# Altium PCB PCBESP.PcbDoc
Units mil, origin at the board's own origin, x right, y up, seen from the top; angles counter-clockwise.
Board outline 4330.71 x 2913.39 mil, 2 copper layers (Top Layer, Bottom Layer); 31 components, 54 nets, 178 pads, 26 vias.
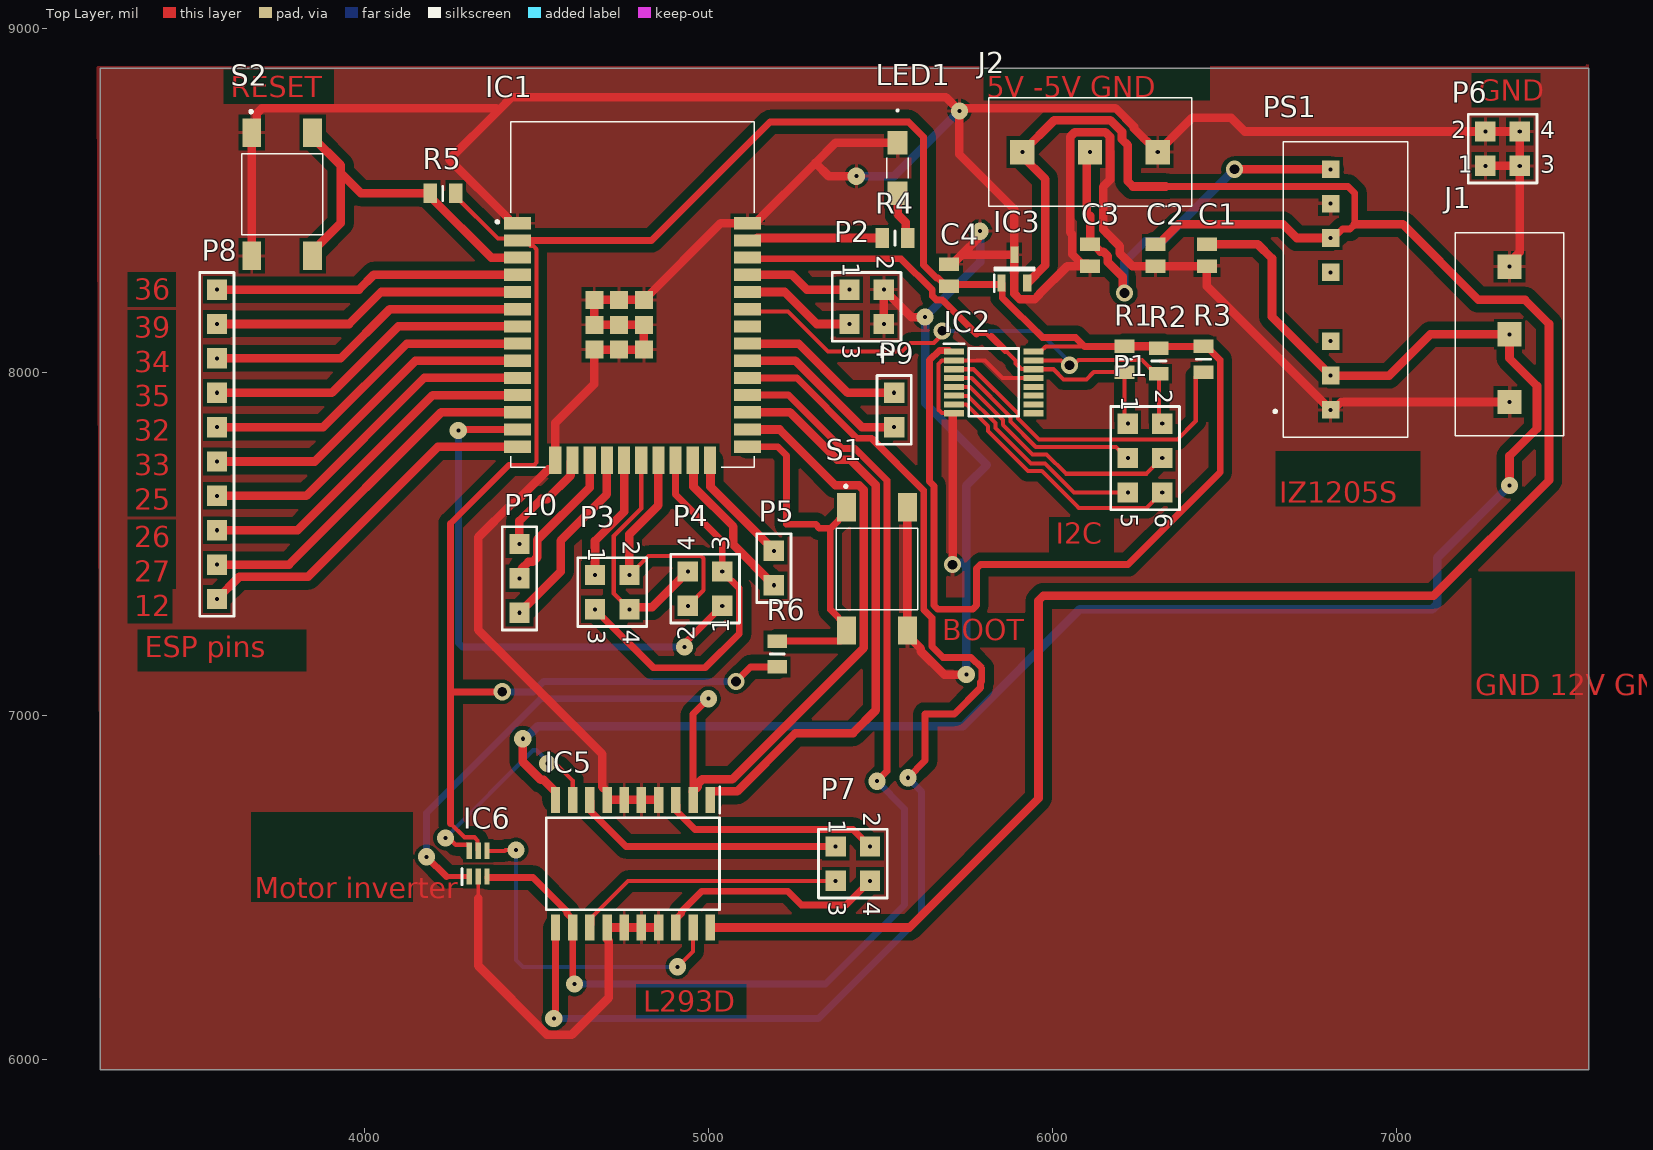
[diagram p0: Top Layer view]
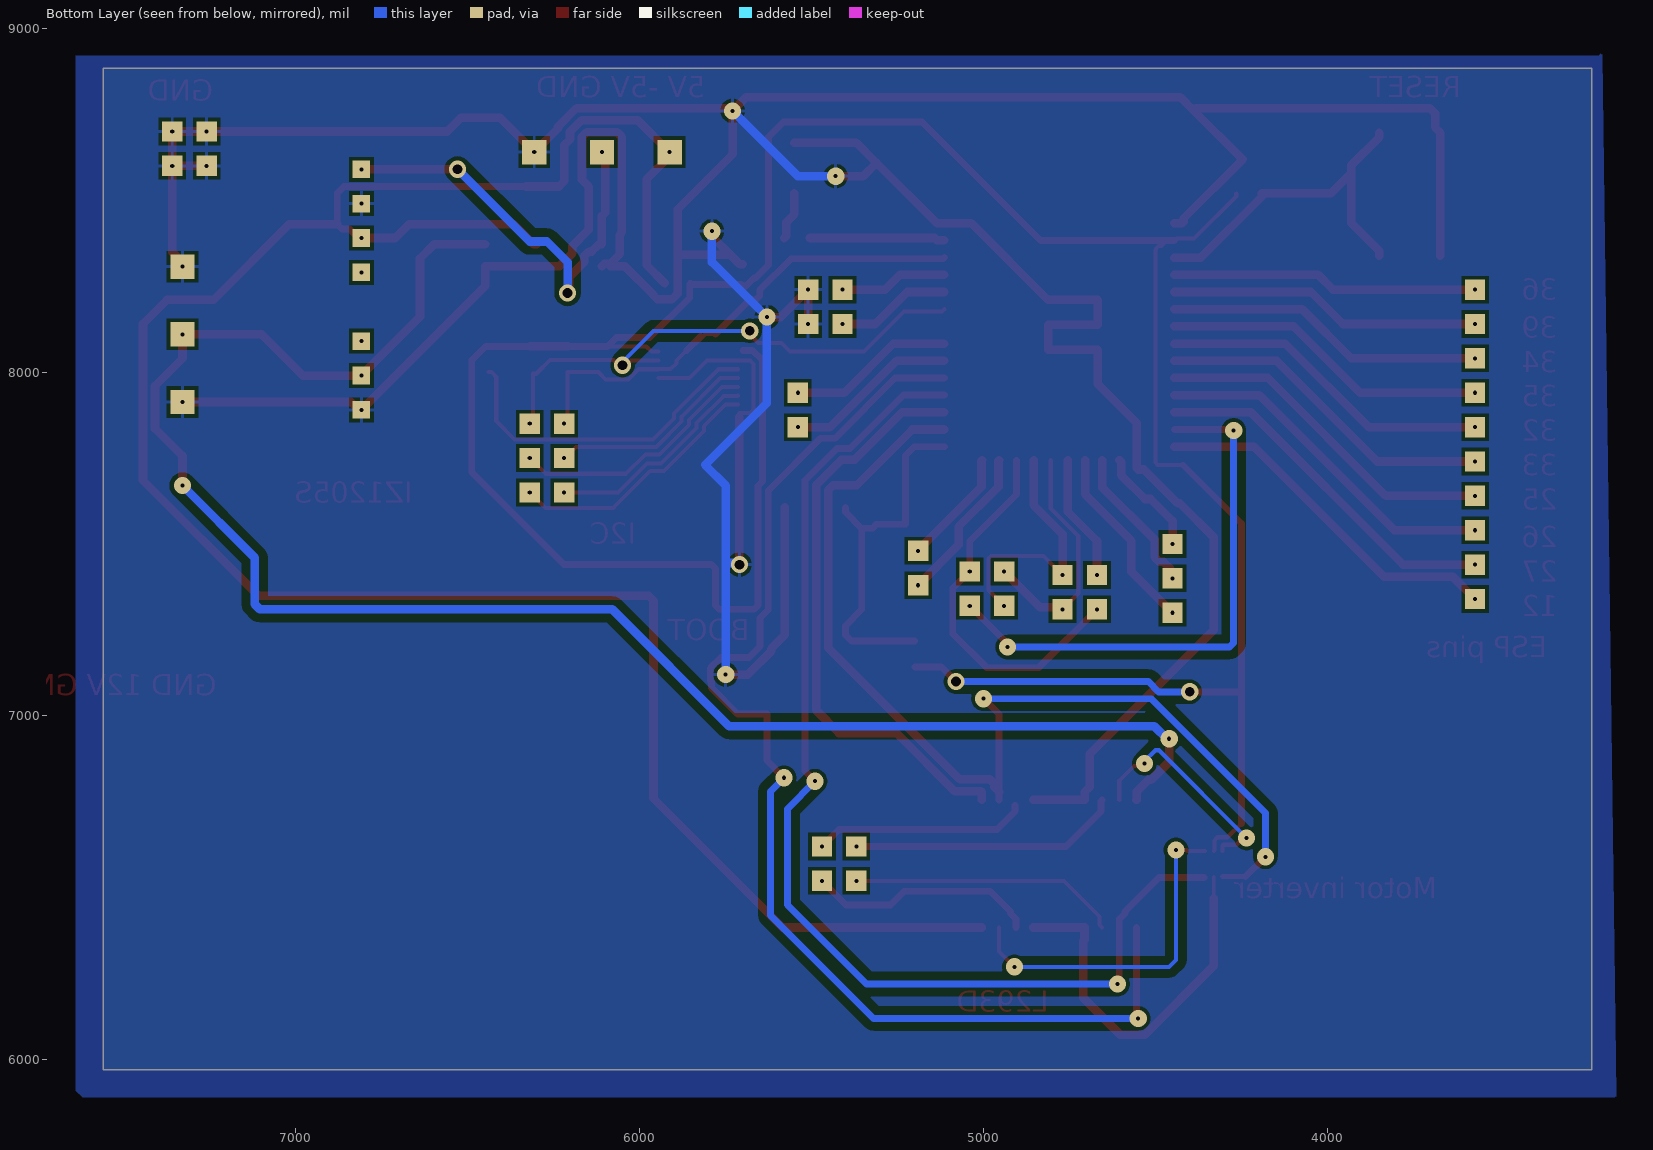
[diagram p1: Bottom Layer view, seen from below]
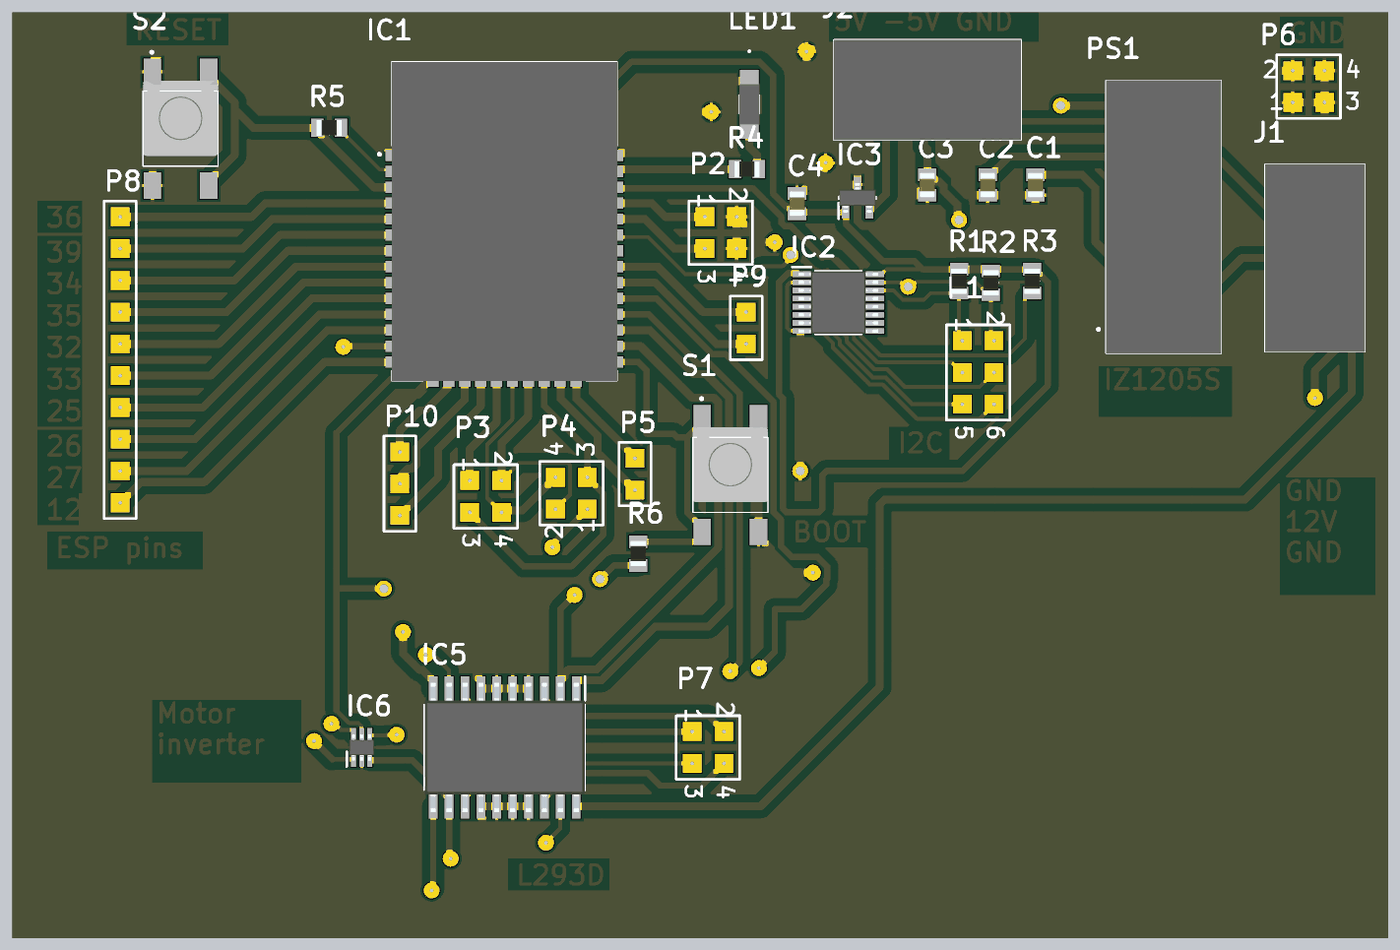
[diagram p2: 3D render of the assembled board from above, using the file's embedded part models]

## Layer stack, top to bottom
Top Solder: solder mask 0.4, Solder Resist, Dk 3.5
Top Layer: signal copper 1.4
Dielectric 1: dielectric 12.6, FR-4, Dk 4.8
Bottom Layer: signal copper 1.4
Bottom Solder: solder mask 0.4, Solder Resist, Dk 3.5

## Board outline
3230,5970 3230,8883.39 7560.71,8883.39 7560.71,5970

## Design rules (kind name [scope] priority, off if disabled: settings)
Clearance [All] p1: gap=10 ignorepadtopadclearanceinfootprint=FALSE except(6: SMDPad-SMDPad; 25: Arc-Fill Arc-Poly Arc-Region Track-Fill Track-Poly Track-Region)
PolygonConnect [All] p1: connectstyle=Relief reliefconductorwidth=10 reliefentries=4 polygonreliefangle="90 Angle" airgapwidth=10
RoutingVias [All] p1: holewidth=27.99 width=50 viastyle="Through Hole" minholewidth=11.81 minwidth=50 maxholewidth=27.99 maxwidth=50
SolderMaskExpansion [All] p1: expansion=4 istentingtop=FALSE
Width [All] p1: maxlimit=100 minlimit=10 preferedwidth=25 minimp=50.000000 maximp=50.000000 favimp=50.000000
30 further rules are at their usual default settings.

## Components (designator, comment, footprint, x,y, rotation, side; value= is the part's Value field where it differs from the comment)
C1 "100nF" CAPC2012X94N 6450,8340 r270 top
C2 "100nF" CAPC2012X94N 6300,8340 r90 top
C3 "100nF" CAPC2012X94N 6110,8340 r90 top
C4 "100nF" CAPC2012X94N 5700,8281.89 r270 top
IC1 "ESP32_WROOM32" ESP32WROOM32 4740,8137.76 r0 top
IC2 "PCA9846PWJ" SOP65P640X110-16N 5830,7970 r0 top
IC3 "LM3480IM3-3.3" SOT95P237X112-3N 5890,8300 r90 top
IC5 "L293DD" SOIC127P1032X265-20N 4780,6570 r270 top
IC6 "NC7WZ04P6X" SOT65P210X110-6N 4330,6570 r90 top
J1 "20.500M_3" 20500M3 7330,7913.15 r90 top
J2 "20.500M_3" 20500M3 6306.85,8640 r180 top
LED1 "APTD3216SECK" APTD3216SECK 5550,8593.82 r270 top
P1 "Header 3X2" HDR2X3 6220,7850 r270 top
P2 "Header 2X2" HDR2X2 5410,8240 r270 top
P3 "Header 2X2" HDR2X2 4670,7410 r270 top
P4 "Header 2X2" HDR2X2 5040,7320 r90 top
P5 "Header 2" HDR1X2 5190,7380 r90 top
P6 "Header 2X2" HDR2X2 7260,8600 r0 top
P7 "Header 2X2" HDR2X2 5370,6620 r270 top
P8 "Header 10" HDR1X10 3570,8240 r270 top
P9 "Header 2" HDR1X2 5540,7840 r90 top
P10 "Header 3" HDR1X3 4450,7500 r270 top
PS1 "IZ1205S" IZ1205S 6810,7890 r90 top
R1 "4.7k" RESC2012X65N 6210,8037.4 r90 top
R2 "4.7k" RESC2012X65N 6310,8032.6 r90 top
R3 "20k" RESC2012X65N 6440,8037.4 r90 top
R4 "200R" RESC2012X65N 5542.6,8390 r0 top
R5 "10k" RESC2012X65N 4227.4,8520 r180 top
R6 "10k" RESC2012X65N 5200,7180 r90 top
S1 "4-1437565-9" 414375659 5490,7460 r0 top
S2 "4-1437565-9" 414375659 3760,8550 r0 top

## Footprints (in the part's own frame and the unit in brackets; to place one, negate y for a bottom-side part, rotate by r counter-clockwise, add the part's x,y. Pads: shape width x height; smd on the part's side, far side on the other; paste and mask are expansions set on the pad)
20500M3 [mm]
  rect 1.8x1.8 hole 0.3: 1(0,0) 2(5,0) 3(10,0)
  silkscreen extent -2.5,-4 12.5,4, body extent -2.5,-4 12.5,4, height 10.3
414375659 [mm]
  rect 1.4x2.1 smd: 1(-2.25,3.725) 2(-2.25,-5.375) 3(2.25,3.725) 4(2.25,-5.375)
  silkscreen extent -3,-3.83 3,5.37, body extent -3,-5 3,5, height 3.4
APTD3216SECK [mm]
  rect 1.75x1.5 smd: 1(-1.875,0) 2(1.875,0)
  silkscreen extent -4.3,-0.8 0.75,0.8, body extent -1.6,-0.8 1.6,0.8, height 1.9
CAPC2012X94N [mm]
  rect 1.02x1.47 smd: 1(-0.81,0) 2(0.81,0)
  body extent -1,-0.63 1,0.63, height 0.94
ESP32WROOM32 [mm]
  rect 2x0.9 smd: 1(-7.5,7.5) 2(-7.5,6.23) 3(-7.5,4.96) 4(-7.5,3.69) 5(-7.5,2.42) 6(-7.5,1.15) 7(-7.5,-0.12) 8(-7.5,-1.39) 9(-7.5,-2.66) 10(-7.5,-3.93) 11(-7.5,-5.2) 12(-7.5,-6.47) 13(-7.5,-7.74) 14(-7.5,-9.01) 25(9.5,-9.01) 26(9.5,-7.74) 27(9.5,-6.47) 28(9.5,-5.2) 29(9.5,-3.93) 30(9.5,-2.66) 31(9.5,-1.39) 32(9.5,-0.12) 33(9.5,1.15) 34(9.5,2.42) 35(9.5,3.69) 36(9.5,4.96) 37(9.5,6.23) 38(9.5,7.5)
  rect 0.9x2 smd: 15(-4.715,-10.01) 16(-3.445,-10.01) 17(-2.175,-10.01) 18(-0.905,-10.01) 19(0.365,-10.01) 20(1.635,-10.01) 21(2.905,-10.01) 22(4.175,-10.01) 23(5.445,-10.01) 24(6.715,-10.01)
  rect 1.33x1.33 smd: 39(-1.835,1.835) 40(0,1.835) 41(1.835,1.835) 42(-1.835,0) 43(0,0) 44(1.835,0) 45(-1.835,-1.835) 46(0,-1.835) 47(1.835,-1.835)
  silkscreen extent -9.1,-10.51 10,14.99, body extent -8,-10.51 10,14.99, height 3.3
HDR1X2 [mm] "Connector; Header; 2 Position"
  rect 1.5x1.5 hole 0.3: 1(0,0) 2(2.54,0)
  silkscreen extent -1.27,-1.27 3.81,1.27
HDR1X3 [mm] "Connector; Header; 3 Position"
  rect 1.5x1.5 hole 0.3: 1(0,0) 2(2.54,0) 3(5.08,0)
  silkscreen extent -1.27,-1.27 6.35,1.27
HDR1X10 [mm] "Connector; Header; 10 Position"
  rect 1.5x1.5 hole 0.3: 1(0,0) 2(2.54,0) 3(5.08,0) 4(7.62,0) 5(10.16,0) 6(12.7,0) 7(15.24,0) 8(17.78,0) 9(20.32,0) 10(22.86,0)
  silkscreen extent -1.27,-1.27 24.13,1.27
HDR2X2 [mm] "Connector; Header; 2x2 Position"
  rect 1.5x1.5 hole 0.3: 1(0,0) 2(0,2.54) 3(2.54,0) 4(2.54,2.54)
  silkscreen extent -1.27,-1.27 3.81,3.81
HDR2X3 [mm] "Connector; Header; 3x2 Position"
  rect 1.5x1.5 hole 0.3: 1(0,0) 2(0,2.54) 3(2.54,0) 4(2.54,2.54) 5(5.08,0) 6(5.08,2.54)
  silkscreen extent -1.27,-1.27 6.35,3.81
IZ1205S [mm]
  rect 1.303x1.303 hole 0.3: 1(0,0) 2(2.54,0) 3(5.08,0) 5(10.16,0) 6(12.7,0) 7(15.24,0) 8(17.78,0)
  silkscreen extent -2.03,-5.7 19.81,4.2, body extent -2.03,-5.7 19.82,3.5, height 11.2
RESC2012X65N [mm]
  rect 1x1.45 smd: 1(-0.95,0) 2(0.95,0)
  silkscreen extent 0,-0.53 0,0.53, body extent -1,-0.63 1,0.63, height 0.65
SOIC127P1032X265-20N [mm]
  rect 1.925x0.7 smd: 1(-4.712,5.715) 2(-4.712,4.445) 3(-4.712,3.175) 4(-4.712,1.905) 5(-4.712,0.635) 6(-4.712,-0.635) 7(-4.712,-1.905) 8(-4.712,-3.175) 9(-4.712,-4.445) 10(-4.712,-5.715) 11(4.712,-5.715) 12(4.712,-4.445) 13(4.712,-3.175) 14(4.712,-1.905) 15(4.712,-0.635) 16(4.712,0.635) 17(4.712,1.905) 18(4.712,3.175) 19(4.712,4.445) 20(4.712,5.715)
  silkscreen extent -5.68,-6.4 3.4,6.42, body extent -5.16,-6.4 5.16,6.4, height 2.65
SOP65P640X110-16N [mm]
  rect 1.475x0.45 smd: 1(-2.938,2.275) 2(-2.938,1.625) 3(-2.938,0.975) 4(-2.938,0.325) 5(-2.938,-0.325) 6(-2.938,-0.975) 7(-2.938,-1.625) 8(-2.938,-2.275) 9(2.938,-2.275) 10(2.938,-1.625) 11(2.938,-0.975) 12(2.938,-0.325) 13(2.938,0.325) 14(2.938,0.975) 15(2.938,1.625) 16(2.938,2.275)
  silkscreen extent -3.67,-2.5 1.85,2.85, body extent -3.2,-2.5 3.2,2.5, height 1.1
SOT65P210X110-6N [mm]
  rect 1.2x0.4 smd: 1(-0.95,0.65) 2(-0.95,0) 3(-0.95,-0.65) 4(0.95,-0.65) 5(0.95,0) 6(0.95,0.65)
  silkscreen extent -1.55,1.2 -0.35,1.2, body extent -1.05,-1 1.05,1, height 1.1
SOT95P237X112-3N [mm]
  rect 1.25x0.6 smd: 1(-1.05,0.95) 2(-1.05,-0.95) 3(1.05,0)
  silkscreen extent -1.68,-1.46 0.08,1.5, body extent -1.18,-1.46 1.18,1.46, height 1.12

## Part data
C1 C2 C3 C4: library part 08055A130JAT2A, "Capacitor", Manufacturer_Name=AVX, Mouser Part Number=581-08055A130JAT2A, Datasheet Link=https://componentsearchengine.com/Datasheets/1/06031A100FAT2A.pdf, Height=0.94mm, Manufacturer_Part_Number=08055A130JAT2A, Mouser Price/Stock=https://www.mouser.com/Search/Refine.aspx?Keyword=581-08055A130JAT2A
IC1: "Integrated Circuit", Manufacturer_Name="Espressif Systems", Manufacturer_Part_Number="ESP32 WROOM32", Datasheet Link=https://www.espressif.com/sites/default/files/documentation/esp32-wroom-32_datasheet_en.pdf, Height=3.2mm
IC2: "Integrated Circuit", Manufacturer_Name=NXP, Mouser Part Number=771-PCA9846PWJ, Datasheet Link=http://www.nxp.com/docs/en/data-sheet/PCA9846.pdf, Height=1.1mm, Manufacturer_Part_Number=PCA9846PWJ, Mouser Price/Stock=https://www.mouser.com/Search/Refine.aspx?Keyword=771-PCA9846PWJ
IC3: "Integrated Circuit", Manufacturer_Name="Texas Instruments", Mouser Part Number=926-LM3480IM3-33, Arrow Part Number=LM3480IM3-3.3, Arrow Price/Stock=https://www.arrow.com/en/products/lm3480im3-3.3/texas-instruments, Datasheet Link=http://www.ti.com/lit/ds/symlink/lm3480.pdf, Height=1.12mm, Manufacturer_Part_Number=LM3480IM3-3.3, Mouser Price/Stock=https://www.mouser.co.uk/ProductDetail/Texas-Instruments/LM3480IM3-33/?qs=X1J7HmVL2ZF9L3Vb4i2kPg%3D%3D
IC5: "Integrated Circuit", Manufacturer_Name=STMicroelectronics, Mouser Part Number=511-L293DD, Arrow Part Number=L293DD, Arrow Price/Stock=https://www.arrow.com/en/products/l293dd/stmicroelectronics, Datasheet Link=https://www.st.com/resource/en/datasheet/l293d.pdf, Height=2.65mm, Manufacturer_Part_Number=L293DD, Mouser Price/Stock=https://www.mouser.co.uk/ProductDetail/STMicroelectronics/L293DD?qs=m4gxtLzGBzoksItTiSkcgg%3D%3D
IC6: "Integrated Circuit", Manufacturer_Name="ON Semiconductor", Mouser Part Number=512-NC7WZ04P6X, Arrow Part Number=NC7WZ04P6X, Arrow Price/Stock=https://www.arrow.com/en/products/nc7wz04p6x/on-semiconductor, Datasheet Link=http://docs-emea.rs-online.com/webdocs/0f9b/0900766b80f9b620.pdf, Height=1.1mm, Manufacturer_Part_Number=NC7WZ04P6X, Mouser Price/Stock=https://www.mouser.co.uk/ProductDetail/ON-Semiconductor-Fairchild/NC7WZ04P6X?qs=CR8BwU6haLfI%2Fe3Upy6lhw%3D%3D
J1 J2: "Connector", Manufacturer_Name="RS Components", Manufacturer_Part_Number=20.500M/3, Datasheet Link=https://docs.rs-online.com/d681/0900766b8157a573.pdf, Height=10.2mm
LED1: "LED", Manufacturer_Name=Kingbright, Mouser Part Number=604-APTD-3216SECK, Arrow Part Number=APTD3216SECK, Arrow Price/Stock=https://www.arrow.com/en/products/aptd3216seck/kingbright, Datasheet Link=https://componentsearchengine.com/Datasheets/1/APTD3216SECK.pdf, Height=1.8mm, Manufacturer_Part_Number=APTD3216SECK, Mouser Price/Stock=https://www.mouser.com/Search/Refine.aspx?Keyword=604-APTD-3216SECK
P1: "Header, 3-Pin, Dual row", LatestRevisionDate=17-Jul-2002, LatestRevisionNote="Re-released for DXP Platform.", Publisher="Altium Limited"
P2 P3 P4 P6 P7: "Header, 2-Pin, Dual row", LatestRevisionDate=17-Jul-2002, LatestRevisionNote="Re-released for DXP Platform.", Publisher="Altium Limited"
P5 P9: "Header, 2-Pin", LatestRevisionDate=17-Jul-2002, LatestRevisionNote="Re-released for DXP Platform.", Publisher="Altium Limited"
P8: "Header, 10-Pin", LatestRevisionDate=17-Jul-2002, LatestRevisionNote="Re-released for DXP Platform.", Publisher="Altium Limited"
P10: "Header, 3-Pin", LatestRevisionDate=17-Jul-2002, LatestRevisionNote="Re-released for DXP Platform.", Publisher="Altium Limited"
PS1: "Power Supply", Manufacturer_Name="XP POWER", Mouser Part Number=209-IZ1205S, Datasheet Link=https://www.xppower.com/portals/0/pdfs/SF_IZ.pdf, Height=11.1mm, Manufacturer_Part_Number=IZ1205S, Mouser Price/Stock=https://www.mouser.co.uk/ProductDetail/XP-Power/IZ1205S?qs=w%2Fv1CP2dgqrcXpexIyZ%252BMg%3D%3D
R1 R2 R3 R4 R5 R6: library part CRG0805F100K, "Resistor", Manufacturer_Name="TE Connectivity", Mouser Part Number=279-CRG0805F100K, Arrow Part Number=CRG0805F100K, Arrow Price/Stock=https://www.arrow.com/en/products/crg0805f100k/te-connectivity, Datasheet Link=http://www.te.com/commerce/DocumentDelivery/DDEController?Action=showdoc&DocId=Customer+Drawing%7F1623109%7FBA%7Fpdf%7FEnglish%7FENG_CD_1623109_BA.pdf%7F1623109-1, Height=0.65mm, Manufacturer_Part_Number=CRG0805F100K, Mouser Price/Stock=https://www.mouser.co.uk/ProductDetail/TE-Connectivity-Neohm/CRG0805F100K?qs=VHcS2MTj4gaSH6styLNYqg%3D%3D
S1 S2: "Switch", Manufacturer_Name="TE Connectivity", Mouser Part Number=N/A, Arrow Part Number=4-1437565-9, Arrow Price/Stock=https://www.arrow.com/en/products/4-1437565-9/te-connectivity, Datasheet Link=http://www.te.com/commerce/DocumentDelivery/DDEController?Action=showdoc&DocId=Customer+Drawing%7F2-1437565-7%7FV%7Fpdf%7FEnglish%7FENG_CD_2-1437565-7_V.pdf%7F4-1437565-9, Height=10mm, Manufacturer_Part_Number=4-1437565-9, Mouser Price/Stock=https://www.mouser.com/Search/Refine.aspx?Keyword=N%2FA

## Via types
v1: diameter 50, hole 11.81, Top Layer to Bottom Layer, 19 vias
v2: diameter 50, hole 27.99, Top Layer to Bottom Layer, 7 vias

## Nets (pads, with @x,y where several pads share a name; then routed paths per layer and width w, separated by ;. In a path a pad name is that pad's centre, name@x,y a point inside that pad or via, vN(x,y) a via of type N, cw(c..) or ccw(c..) an arc to the next point about the centre after c; other vN are vias at no path point)
3.3V: C4.2 IC1.2 IC2.1 IC2.16 IC3.1 IC6.5 R1.2 R2.2 R3.2 R5.1 R6.1 | length 8269.1
  Top Layer w12: 4250,6687.4 4290.38,6647.02 4318.91,6647.02 4328.28,6637.65 4328.28,6609.12 IC6.5 ; R5.1 4264.8,8511.14 4387.35,8388.59 4439.17,8388.59 IC1.2 ; 4420,7730 4493.06,7730 4500.09,7737.03 4500.09,8357.38 4490.72,8366.75 4482.66,8366.75 IC1.2@4466.38,8383.03 ; IC2.16 5965.85,8059.57 5981.08,8074.8 6094.26,8074.8
  Top Layer w18: 4250,7560 4420,7730
  Top Layer w20: 4250,6687.4 4250,7070 ; 4250,7560 4250,7070 ; v2(4400,7070) 4250,7070 ; IC1.2 4466.38,8383.03 4834.7,8383.03 5179.17,8727.5 5582.4,8727.5 5625.3,8684.6 5625.3,8311.18 5662.78,8273.7 5667.44,8273.7 5691.14,8250 C4.2 5704.33,8254.33 5850.79,8254.33 5852.6,8256.14 IC3.1 5854.41,8256.85 5854.41,8217.45 5971.06,8100.8 6068.26,8100.8 6094.26,8074.8 R1.2 ; v2(5080,7100) 5122.6,7142.6 R6.1 ; IC2.1@5700,8062.83 5671.49,8062.83 5643.3,8034.64 5643.3,7681.55 5656.14,7668.7 5656.14,7321.72 5667.86,7310 5768.28,7310 5780,7321.72 5780,7428.28 5791.72,7440 6220,7440 6488.54,7708.54 6488.54,8035.12 6448.86,8074.8 R3.2 R2.2@6320,8074.8
  Top Layer w25: R1.2 R2.2@6320,8074.8
  Bottom Layer w20: v2(4400,7070) 4490.29,7070 4520.29,7100 v2(5080,7100)
5V: C2.2 IC3.2 IC5.20 J2.3 PS1.6 | length 6782.3
  Top Layer w20: 6330,8540 6860,8540 6880,8520 6880,8430 6865.86,8415.86 6844.33,8415.86 6818.47,8390 PS1.6
  Top Layer w25: IC5.20 5584.49,6384.49 5960,6760 5960,7335.36 5974.64,7350 7110,7350 7445,7685 7445,8140.36 7375.36,8210 7240,8210 7020,8430 6880,8430 ; IC3.2 5980,8311.26 5980,8560.74 5913.15,8627.59 J2.3 6006.08,8732.93 6169.25,8732.93 6202.93,8699.25 6202.93,8677.07 6220,8660 6220,8554.64 6234.64,8540 6330,8540 ; C2.2 6308.86,8371.89 6366.97,8430 6671.22,8430 6711.22,8390 PS1.6
+12V: C1.1 IC5.10 J1.2 PS1.2 | length 5170.6
  Top Layer w25: v1(4459.85,6933.49) 4459.85,6866.31 4511.99,6814.17 4520.46,6814.17 4553.72,6780.91 4553.72,6756.79 IC5.10 ; C1.1 6598.11,8371.89 6639.16,8330.84 6639.16,8160.84 PS1.2 6980,7990 7100,8110 J1.2 7330,8040 7410,7960 7410,7835.92 7330,7755.92 v1(7330,7670)
  Bottom Layer w25: v1(4459.85,6933.49) 4466.61,6933.49 4503.13,6970 5740,6970 6080,7310 7105.36,7310 7120,7324.64 7120,7460 v1(7330,7670)
-5V: C3.2 J2.2 PS1.8 | length 1271.5
  Top Layer w25: J2.2 6100,8630 6100,8464.11 6110,8454.11 C3.2 6118.86,8371.89 6140.06,8350.69 6148.26,8350.69 6161.44,8337.51 6161.44,8320.45 6205.22,8276.67 6205.22,8234.78 v2(6210,8230) ; v2(6530,8590) PS1.8
  Bottom Layer w25: v2(6210,8230) 6210,8320 6270,8380 6320,8380 v2(6530,8590)
GND: C1.2 C2.1 C3.1 C4.1 IC1.1 IC1.15 IC1.38 IC1.39 IC1.40 IC1.41 IC1.42 IC1.43 IC1.44 IC1.45 IC1.46 IC1.47 IC2.2 IC2.8 IC2.13 IC3.3 IC5.4 IC5.5 IC5.6 IC5.7 IC5.14 IC5.15 IC5.16 IC5.17 IC6.2 J1.1 J1.3 J2.1 LED1.1 P2.2 P2.4 P6.1 P6.2 P6.3 P6.4 PS1.1 PS1.7 S1.3 S1.4 S2.1 S2.2 | length 16813.4
  Top Layer w10: 4330,6470 IC6.2
  Top Layer w12: IC2.8@5710,7881.17 5678.67,7881.17 5669.3,7890.54 5669.3,8023.87 5678.67,8033.24 5713.6,8033.24 IC2.2 5804.41,8033.98 5855.59,7982.8 IC2.13
  Top Layer w25: S2.2 S2.1 3686.48,8711.71 3686.48,8752.86 3701.12,8767.5 4382.5,8767.5 4388.78,8761.22 ; 4330,6470 4330,6272.82 4530.32,6072.5 4602.5,6072.5 4710,6180 4710,6345.49 4706.28,6349.21 4706.28,6383.21 IC5.14 IC5.15 IC5.16 IC5.17 ; IC1.1 4423.07,8433.03 4417.85,8438.25 4417.85,8447 4246.21,8618.64 4388.78,8761.22 ; IC5.4 IC5.5 IC5.6 IC5.7 4705,6779.63 4691.28,6793.35 4691.28,6888.72 4330,7250 4330,7519.6 4428.6,7618.2 4435.26,7618.2 4533.86,7716.79 4549.15,7716.79 4554.37,7722.01 4554.37,7851.88 4667.76,7965.27 IC1.45 IC1.46 IC1.47 IC1.44 IC1.43 IC1.42 IC1.39 IC1.40 IC1.41 5035.28,8433.03 IC1.38 5135.67,8433.03 5311.32,8608.68 ; v1(5430,8570) 5350,8570 5311.32,8608.68 ; P2.4 P2.2 5590,8160 v1(5630,8160) ; LED1.1 5370.28,8667.64 5311.32,8608.68 ; S1.3 S1.4 5578.58,7234.61 5617.5,7195.69 5617.5,7188.25 5685.75,7120 v1(5750,7120) ; C4.1 5708.86,8313.78 5736.42,8341.34 ; v2(5710,7440) 5710,7537.22 5710,7870 ; v1(5790,8410) 5785.22,8405.22 5785.22,8390.14 5736.42,8341.34 ; C3.1@6085.37,8308.11 6043.56,8308.11 5961.71,8226.26 5961.71,8224.74 5948.53,8211.56 5906.27,8211.56 5890,8227.83 IC3.3 ; C3.1 6102.42,8315.69 6085.37,8315.69 6058.56,8342.49 6058.56,8399.82 6052.07,8406.32 6052.07,8684.75 6065.25,8697.93 6154.75,8697.93 6167.93,8684.75 6167.93,8559.45 6148.26,8539.77 6148.26,8414.47 6196.44,8366.29 6196.44,8345.24 6233.56,8308.11 C2.1 C1.2 6450,8250 PS1.1 6817.12,7890 6840.27,7913.15 J1.1 ; P6.1 P6.3 ; J1.3 7330,8319.26 7360,8349.26 P6.3 ; 4388.78,8761.22 4427.57,8800 5690,8800 v1(5730,8760) ; v1(5730,8760) 5736.76,8760 5744.7,8767.93 6183.75,8767.93 6237.93,8713.75 6237.93,8708.92 J2.1 6406.85,8740 6520,8740 6560,8700 P6.2 P6.4 P6.3 ; v1(5730,8760) 5730,8633.34 5890,8473.34 IC3.3 ; 5736.42,8341.34 IC3.3
  Bottom Layer w25: v1(5430,8570) 5540,8570 v1(5730,8760) ; v2(5710,7440) 5714.78,7444.78 5744.78,7444.78 5750,7450 ; v1(5750,7120) 5750,7450 ; v1(5790,8410) 5790,8320 v1(5630,8160) 5630,7910 5810,7730 5750,7670 5750,7450
NetIC1_3: IC1.3 R5.2 S2.3 S2.4 | length 1047.5
  Top Layer w25: S2.4 3848.58,8352.17 3930,8433.58 3930,8579.02 ; S2.3 3848.58,8682.87 3930,8601.46 3930,8579.02 ; IC1.3 4368.11,8333.03 4190,8511.14 R5.2 3989.02,8520 3930,8579.02
NetIC1_4: IC1.4 P8.1 | length 892.5
  Top Layer w25: P8.1 3983.53,8240 4026.57,8283.03 IC1.4
NetIC1_5: IC1.5 P8.2 | length 913.3
  Top Layer w25: P8.2 3954.63,8140 4047.66,8233.03 IC1.5
NetIC1_6: IC1.6 P8.3 | length 934
  Top Layer w25: P8.3 3929.63,8040 4072.66,8183.03 IC1.6
NetIC1_7: IC1.7 P8.4 | length 954.7
  Top Layer w25: P8.4 3904.63,7940 4097.66,8133.03 IC1.7
NetIC1_8: IC1.8 P8.5 | length 975.4
  Top Layer w25: P8.5 3879.63,7840 4122.66,8083.03 IC1.8
NetIC1_9: IC1.9 P8.6 | length 996.1
  Top Layer w25: P8.6 3854.63,7740 4147.66,8033.03 IC1.9
NetIC1_10: IC1.10 P8.7 | length 1016.8
  Top Layer w25: P8.7 3829.63,7640 4172.66,7983.03 IC1.10
NetIC1_11: IC1.11 P8.8 | length 1037.5
  Top Layer w25: P8.8 3804.63,7540 4197.66,7933.03 IC1.11
NetIC1_12: IC1.12 P8.9 | length 1058.2
  Top Layer w25: P8.9 3779.63,7440 4222.66,7883.03 IC1.12
NetIC1_13: IC1.13 P4.1 | length 1620.5
  Top Layer w20: v1(4272.26,7830.53) 4274.76,7833.03 IC1.13 ; v1(4930,7200) 4930,7210 P4.1
  Bottom Layer w20: v1(4272.26,7830.53) 4272.26,7211.72 4283.97,7200 v1(4930,7200)
NetIC1_14: IC1.14 P8.10 | length 1058.2
  Top Layer w25: P8.10 3635,7405 3835,7405 4213.03,7783.03 IC1.14
NetIC1_16: IC1.16 P10.1 | length 317.4
  Top Layer w25: P10.1 4450,7567.03 4513.97,7631 4530.61,7631 4599.15,7699.54 4599.15,7738.44 IC1.16
NetIC1_17: IC1.17 P10.2 | length 435.8
  Top Layer w25: P10.2 4456.52,7406.52 4456.52,7428.38 4476.11,7447.97 4488.85,7447.97 4502.03,7461.15 4502.03,7512.03 4654.37,7664.37 IC1.17
NetIC1_18: IC1.18 P10.3 | length 549
  Top Layer w25: P10.3 4570,7420 4570,7510 4704.37,7644.37 IC1.18
NetIC1_19: IC1.19 P3.1 | length 368.6
  Top Layer w25: P3.1 4670,7509.04 4754.37,7593.41 IC1.19
NetIC1_20: IC1.20 P3.4 P4.4 | length 701.2
  Top Layer w12: P3.4 4724.47,7355.53 4724.47,7523.2 4804.37,7603.1 IC1.20
  Top Layer w25: P3.4 4776.52,7316.52 4836.52,7316.52 P4.4
NetIC1_21: IC1.21 P3.2 P4.2 | length 767.4
  Top Layer w12: P3.2 4825.53,7465.53 4978.5,7465.53 4985.53,7458.5 4985.53,7365.53 P4.2
  Top Layer w25: P3.2 4770,7528.43 4854.37,7612.8 IC1.21
NetIC1_22: IC1.22 P3.3 P4.3 | length 1112
  Top Layer w20: P3.3 4840,7140 4990,7140 5089.53,7239.53 5089.53,7370.47 P4.3 5040,7508.47 4904.37,7644.1 IC1.22
NetIC1_23: IC1.23 P5.1 | length 461.3
  Top Layer w25: IC1.23 4956.4,7741.63 4956.4,7666.79 5072.5,7550.69 5072.5,7497.5 P5.1
NetIC1_24: IC1.24 P5.2 | length 340.6
  Top Layer w25: IC1.24 5005.9,7742.14 5005.9,7666.79 5190,7482.69 P5.2
NetIC1_25: IC1.25 R6.2 S1.1 S1.2 | length 1075.1
  Top Layer w20: IC1.25 5201.07,7783.03 5226.6,7757.5 5226.6,7557.5 5311.63,7557.5 5323.35,7545.78 5354.33,7545.78 ; R6.2 5383.86,7217.4 5401.42,7234.96 S1.2 5401.42,7262.17 5354.33,7309.26 5354.33,7545.78 ; S1.1 5401.42,7592.87 5354.33,7545.78
NetIC1_26: IC1.26 IC5.2 IC6.1 | length 3091.4
  Top Layer w15: 4237.4,6532.6 IC6.1
  Top Layer w20: v1(4180,6590) 4237.4,6532.6 ; IC5.2 4955,6779.63 4955,7005 v1(5000,7050)
  Top Layer w25: IC5.2@4955,6779.63 4968.72,6793.35 4968.72,6802.73 4981.9,6815.91 5069.65,6815.91 5451.48,7197.73 5451.48,7657.31 5438.3,7670.49 5369.51,7670.49 5206.97,7833.03 IC1.26
  Bottom Layer w20: v1(4180,6590) 4180,6717.28 4512.72,7050 v1(5000,7050)
NetIC1_27: IC1.27 IC5.1 | length 1719.1
  Top Layer w25: IC5.1 5005,6779.63 5006.28,6780.91 5084.15,6780.91 5253.25,6950 5420.25,6950 5486.48,7016.23 5486.48,7671.81 5413.29,7745 5375,7745 5236.97,7883.03 IC1.27
NetIC1_28: IC1.28 IC5.12 IC6.3 | length 3335.2
  Top Layer w20: IC6.3@4357.87,6530 4489.45,6530 4588.78,6430.67 4588.78,6424.82 4605,6408.6 IC5.12 4605,6225 v1(4610,6220) ; IC1.28 5232.93,7933.03 5388.46,7777.5 5426.75,7777.5 5518.98,7685.27 5518.98,6838.98 v1(5490,6810)
  Bottom Layer w20: v1(4610,6220) 5340,6220 5570.54,6450.54 5570.54,6729.46 v1(5490,6810)
NetIC1_29: IC1.29 IC5.11 | length 3617.9
  Top Layer w20: v1(4550,6120) 4555,6125 IC5.11 ; IC1.29 5256.97,7983.03 5432.5,7807.5 5474.92,7807.5 5626.14,7656.28 5626.14,7309.29 5650,7285.43 5650,7201.72 5681.54,7170.18 5763.46,7170.18 5795,7138.64 5795,7101.36 5791.82,7098.18 5791.82,7081.82 5715,7005 5630,7005 5630,6870 v1(5580,6820)
  Bottom Layer w20: v1(4550,6120) 5320,6120 5620,6420 5620,6780 v1(5580,6820)
NetIC1_30: IC1.30 P9.1 | length 505.9
  Top Layer w25: IC1.30 5252.93,8033.03 5445.96,7840 P9.1
NetIC1_31: IC1.31 P9.2 | length 485.2
  Top Layer w25: IC1.31 5261.71,8083.03 5404.74,7940 P9.2
NetIC1_33: IC1.33 IC2.15 P1.2 R2.1 | length 1608.2
  Top Layer w12: IC1.33 5120.55,8176.5 5231.09,8176.5 5347.59,8060 5563.14,8060 5587.97,8084.83 5655.77,8084.83 5655.77,8085.48 5680,8109.72 v2(5680,8120) ; IC2.15 6025.74,8033.98 6039.72,8020 v2(6050,8020) 6060.28,8020 6075.97,8035.69 6260.65,8035.69 6301.14,7995.2 R2.1 6310,7860 P1.2
  Bottom Layer w12: v2(5680,8120) 5960,8120 6050,8030 v2(6050,8020)
NetIC1_34: IC1.34 P2.3 | length 334.5
  Top Layer w25: IC1.34 5221.71,8233.03 5314.74,8140 P2.3
NetIC1_35: IC1.35 P2.1 | length 313.8
  Top Layer w25: IC1.35 5242.81,8283.03 5285.84,8240 P2.1
NetIC1_36: IC1.36 IC2.14 P1.1 R1.1 | length 1413.8
  Top Layer w12: 5779.17,8110.83 5809.17,8110.83 5815.69,8104.31 ; 5863.38,8063.38 5892.79,8033.98 5893.6,8033.98 5893.6,8025.52 5910.01,8009.12 5944.94,8009.12 IC2.14 6003.63,8008.39 6033.02,7979 6099.74,7979 6120.74,8000 R1.1 6210,7860 P1.1
  Top Layer w20: IC1.36 5117.3,8329.75 5560.25,8329.75 5651.06,8238.94 5651.06,8221.64 5662.78,8209.92 5680.08,8209.92 5779.17,8110.83 ; 5822.45,8104.31 5863.38,8063.38
NetIC1_37: IC1.37 R4.1 | length 394.1
  Top Layer w25: IC1.37 5135.67,8383.03 5142.64,8390 R4.1
NetIC2_3: IC2.3 R3.1 | length 974.9
  Top Layer w12: IC2.3 5771.35,8008.39 5900.63,7879.1 5900.63,7864.95 5961.11,7804.47 6364.47,7804.47 6417.46,7857.46 6417.46,7986.31 6431.14,8000 R3.1
NetIC2_4: IC2.4 P1.3 | length 610.4
  Top Layer w12: IC2.4 5765.83,7982.8 5878.63,7869.99 5878.63,7855.83 5952,7782.47 6185.26,7782.47 6217.73,7750 P1.3
NetIC2_5: IC2.5 P1.4 | length 737.5
  Top Layer w12: IC2.5 5715.06,7956.47 5761.04,7956.47 5856.63,7860.88 5856.63,7846.72 5942.88,7760.47 5983.47,7760.47 6039.47,7704.47 6274.47,7704.47 P1.4
NetIC2_6: IC2.6 P1.5 | length 630.6
  Top Layer w12: IC2.6 5715.06,7930.88 5755.52,7930.88 5834.63,7851.76 5834.63,7837.61 5938.1,7734.14 5978.69,7734.14 6062.83,7650 P1.5
NetIC2_7: IC2.7 P1.6 | length 757.7
  Top Layer w12: IC2.7 5715.06,7905.29 5749.99,7905.29 5812.63,7842.65 5812.63,7828.5 5928.99,7712.14 5969.58,7712.14 6077.25,7604.47 6274.47,7604.47 P1.6
NetIC2_9: IC2.9
NetIC2_10: IC2.10
NetIC2_11: IC2.11
NetIC2_12: IC2.12
NetIC5_3: IC5.3 P7.2 | length 621.6
  Top Layer w20: IC5.3@4908.78,6740 4908.78,6721.77 4961.03,6669.53 5420.47,6669.53 P7.2
NetIC5_8: IC5.8 P7.1 | length 788.7
  Top Layer w20: IC5.8 4658.78,6751.73 4658.78,6721.77 4760.55,6620 P7.1
NetIC5_9: IC5.9 IC6.6 | length 666.9
  Top Layer w12: v1(4234.71,6644.71) 4244.99,6644.71 4264.68,6625.02 4302.54,6625.02 4304.41,6623.15 IC6.6 ; v1(4531.67,6861.67) 4538.94,6854.4 4562.01,6854.4 4605,6811.41 IC5.9
  Bottom Layer w12: v1(4234.71,6644.71) 4490,6900 4499.94,6900 4531.67,6868.27 v1(4531.67,6861.67)
NetIC5_13: IC5.13 P7.3 | length 785.4
  Top Layer w12: IC5.13 4662.78,6392.27 4662.78,6416.57 4766.21,6520 P7.3
NetIC5_18: IC5.18 P7.4 | length 671.8
  Top Layer w20: IC5.18 4905,6408.6 4921.22,6424.82 4921.22,6430.67 4980.55,6490 5230,6490 5270,6450 5400,6450 P7.4
NetIC5_19: IC5.19 IC6.4 | length 1016.9
  Top Layer w12: IC6.4 4407.4,6607.4 4410,6610 v1(4440,6610) ; v1(4910,6270) 4955,6315 IC5.19
  Bottom Layer w12: v1(4440,6610) 4440,6290 4460,6270 v1(4910,6270)
NetLED1_2: LED1.2 R4.2 | length 142.4
  Top Layer w25: LED1.2 5550,8459.54 5574.14,8435.4 5574.14,8395.86 R4.2
pads on no net: IC1.32 PS1.3 PS1.5

## Polygon pours and split planes (outlines as drawn)
GND on Bottom Layer "GND_L02_P001" (solid, pour order 1): 3200,8930 3210,8920 7640,8920 7640,5910 7620,5890 3160,5890
GND on Top Layer "GND_L01_P000" (solid, pour order 0): 3220,8890 7550,8890 7560,8900 7560,5970 3230,5970

## Other copper
Top Layer:
  text "RESET" at 3610,8800 h60
  text "5V -5V GND" at 5810,8800 h60
  text "GND" at 7240,8790 h60
  text "36" at 3330,8210 h60
  text "39" at 3330,8100 h60
  text "34" at 3330,8000 h60
  text "35" at 3330,7900 h60
  text "32" at 3330,7800 h60
  text "33" at 3330,7700 h60
  text "IZ1205S" at 6660,7620 h60
  text "25" at 3330,7600 h60
  text "I2C" at 6010,7500 h60
  text "26" at 3330,7490 h60
  text "27" at 3330,7390 h60
  text "12" at 3330,7290 h60
  text "BOOT" at 5680,7220 h60
  text "ESP pins" at 3360,7169.99 h60
  text "GND 12V GND" at 7230,7060 h60
  text "Motor inverter" at 3680,6470 h60
  text "L293D" at 4810,6140 h60

## Text inside footprints (layer, text, board x,y; h text height)
P1: Top Overlay "6" at 6300,7590 h50 r270; Top Overlay "5" at 6200,7590 h50 r270; Top Overlay "2" at 6300,7950 h50 r270; Top Overlay "1" at 6200,7930 h50 r270
P2: Top Overlay "1" at 5390,8320 h50 r270; Top Overlay "2" at 5490,8340 h50 r270; Top Overlay "4" at 5490,8080 h50 r270; Top Overlay "3" at 5390,8080 h50 r270
P3: Top Overlay "1" at 4650,7490 h50 r270; Top Overlay "2" at 4750,7510 h50 r270; Top Overlay "4" at 4750,7250 h50 r270; Top Overlay "3" at 4650,7250 h50 r270
P4: Top Overlay "1" at 5060,7240 h50 r90; Top Overlay "2" at 4960,7220 h50 r90; Top Overlay "4" at 4960,7480 h50 r90; Top Overlay "3" at 5060,7480 h50 r90
P6: Top Overlay "1" at 7180,8580 h50; Top Overlay "2" at 7160,8680 h50; Top Overlay "4" at 7420,8680 h50; Top Overlay "3" at 7420,8580 h50
P7: Top Overlay "1" at 5350,6700 h50 r270; Top Overlay "2" at 5450,6720 h50 r270; Top Overlay "4" at 5450,6460 h50 r270; Top Overlay "3" at 5350,6460 h50 r270